# Altium PCB PCB1.PcbDoc
Units mm, origin at the board's own origin, x right, y up, seen from the top; angles counter-clockwise.
Board outline 28.19 x 24.38 mm, 2 copper layers (Top Layer, Bottom Layer); 10 components, 10 nets, 42 pads, 0 vias.
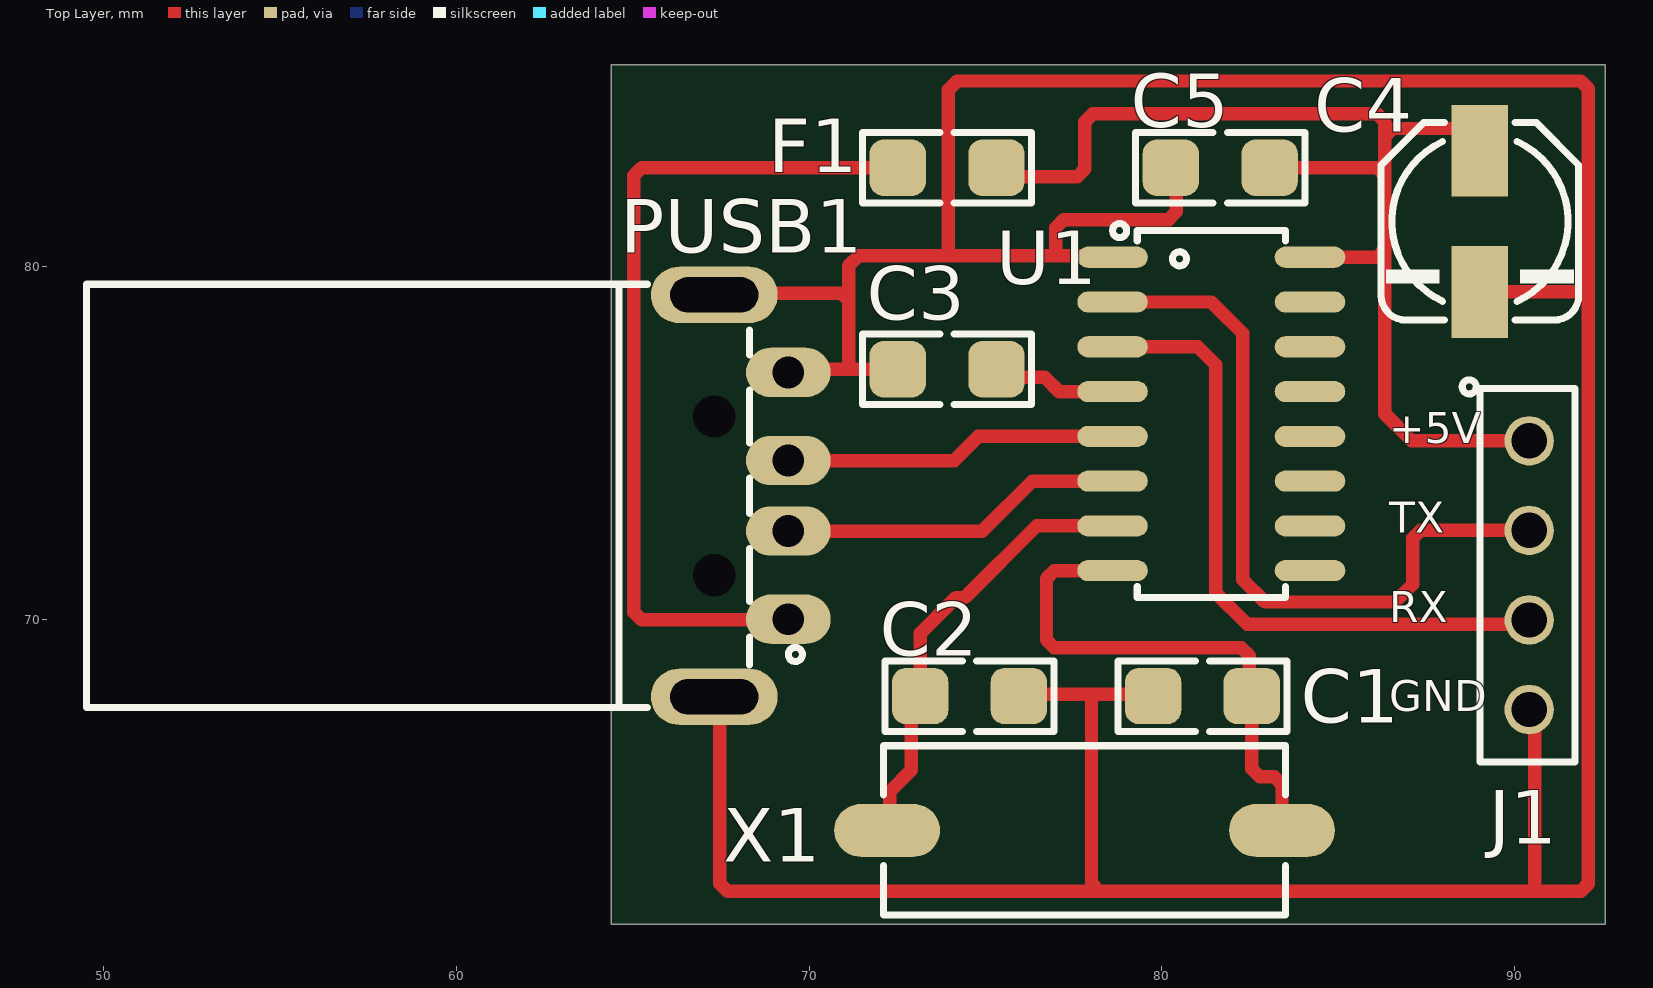
[diagram p0: Top Layer view]
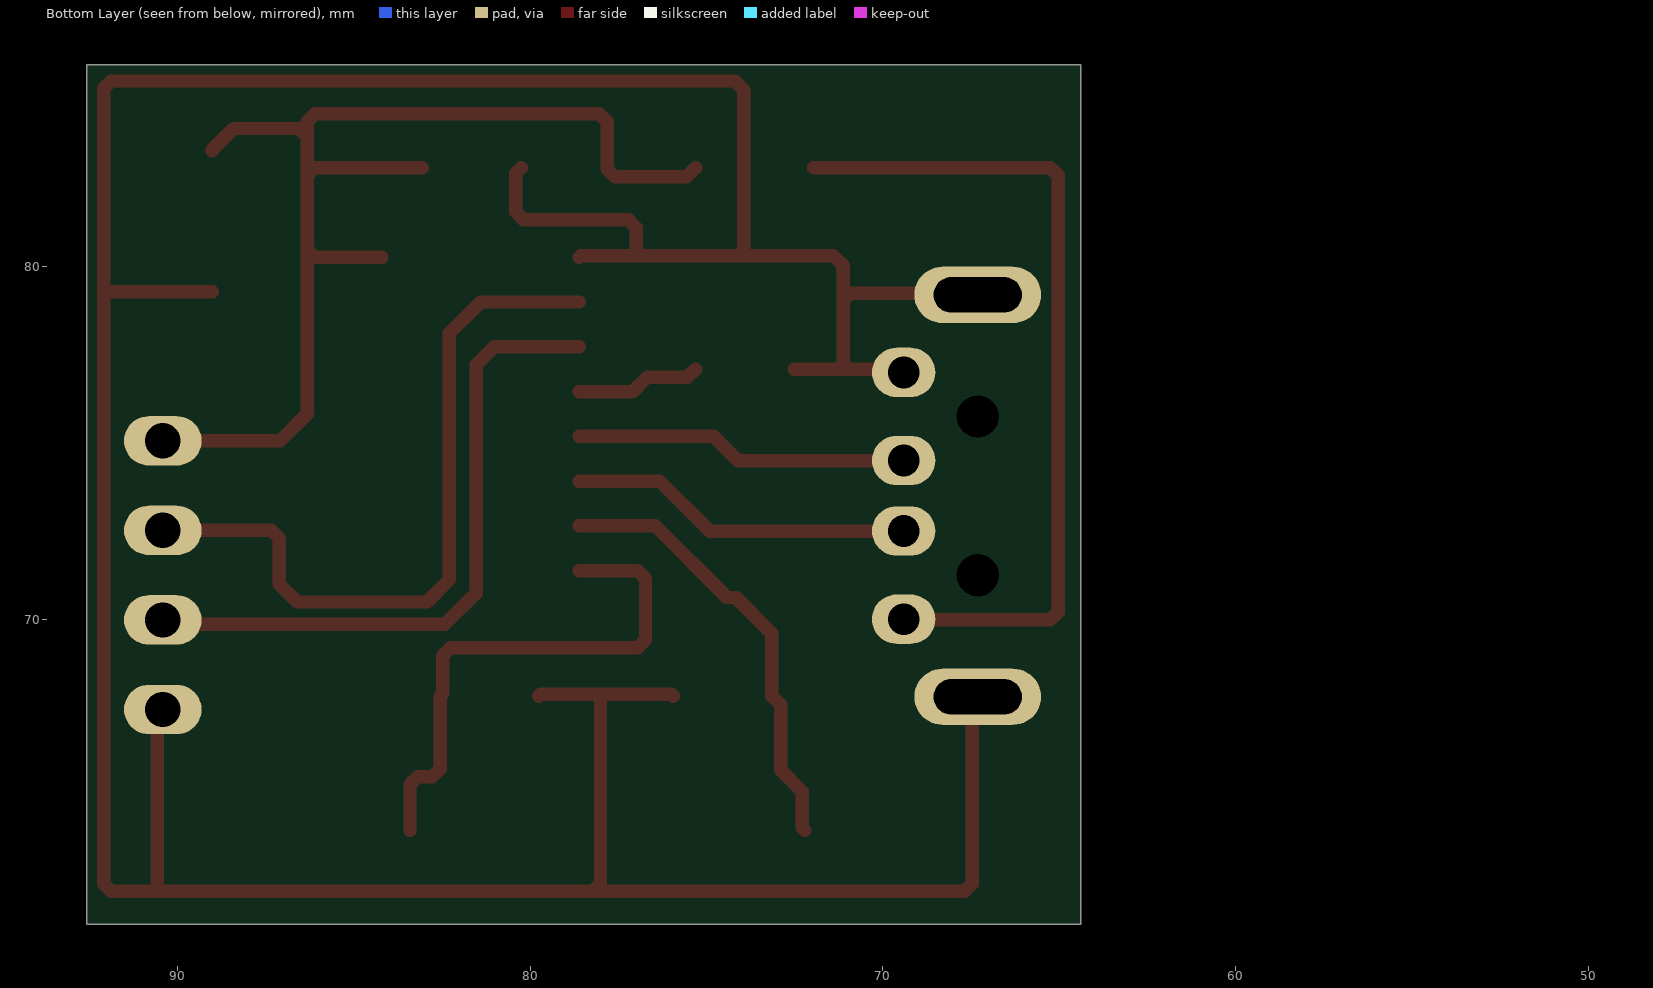
[diagram p1: Bottom Layer view, seen from below]

## Layer stack, top to bottom
Top Solder: solder mask 0.0102, Solder Resist, Dk 3.5
Top Layer: signal copper 0.0356
Dielectric 1: dielectric 0.32, FR-4, Dk 4.8
Bottom Layer: signal copper 0.0356
Bottom Solder: solder mask 0.0102, Solder Resist, Dk 3.5

## Board outline
64.389,61.341 92.583,61.341 92.583,85.725 64.389,85.725

## Design rules (kind name [scope] priority, off if disabled: settings)
Clearance [All] p1: gap=0.254 ignorepadtopadclearanceinfootprint=FALSE except(0: Arc-Hole Track-Hole SMDPad-Hole THPad-Hole Via-Hole Fill-Hole Poly-Hole Region-Hole Text-Hole)
PolygonConnect [All] p1: connectstyle=Relief reliefconductorwidth=0.254 reliefentries=4 polygonreliefangle="90 Angle" airgapwidth=0.254
RoutingVias [All] p1: holewidth=0.711 width=1.27 viastyle="Through Hole" minholewidth=0.711 minwidth=1.27 maxholewidth=0.711 maxwidth=1.27
SolderMaskExpansion [All] p1: expansion=0.102 istentingtop=FALSE
Width [All] p1: maxlimit=0.5 minlimit=0.254 preferedwidth=0.254
30 further rules are at their usual default settings.

## Components (designator, comment, footprint, x,y, rotation, side; value= is the part's Value field where it differs from the comment)
C1 "22pF" C1206 81.156,67.818 r0 top
C2 "22pF" C1206 74.549,67.818 r180 top
C3 "10nF" C1206 73.914,77.089 r0 top
C4 "10uF" C_EL_5 89.027,81.28 r270 top
C5 "100nF" C1206 81.661,82.804 r0 top
F1 "100mA" F1206 73.914,82.804 r0 top
J1 "HDRF4" HDR_F_1X4 90.424,71.247 r270 top
PUSB1 "CONN_USB_A" USB_A_PLG_RA 68.61,73.497 r90 top
U1 "CH340G" SO_16 81.407,75.819 r0 top
X1 "12MHz" XTL_2_11X5 77.813,64.008 r180 top

## Footprints (in the part's own frame and the unit in brackets; to place one, negate y for a bottom-side part, rotate by r counter-clockwise, add the part's x,y. Pads: shape width x height; smd on the part's side, far side on the other; paste and mask are expansions set on the pad)
C1206 [mm] "CHIP Capacitor, 3.2X1.6mm, 1206"
  rrect50% 1.6x1.6 smd mask+0.075: 1(-1.4,0) 2(1.4,0)
  Top Layer pour cut-out: -0.8,1 -0.8,-1 0.8,-1 0.8,1
  silkscreen extent -2.4,-1 2.4,1, body extent -1.6,-0.8 1.6,0.8, height 1
C_EL_5 [mm] "Electrolytic Cap, D: 5.0mm, L: 5.8mm, Size C"
  rect 2.6x1.6 smd: 1(-2,0) 2(2,0)
  Top Layer pour cut-out: 1.905,2.667 1.905,-2.7 -1.905,-2.7 -1.905,2.667
  silkscreen extent -2.8,-2.8 2.8,2.8, body extent -3,-2.65 3,2.65
F1206 [mm] "FUSE, 1206, 3.2x1.6mm"
  rrect50% 1.6x1.6 smd mask+0.075: 1(-1.4,0) 2(1.4,0)
  Top Layer pour cut-out: -0.8,1 -0.8,-1 0.8,-1 0.8,1
  silkscreen extent -2.4,-1 2.4,1, body extent -1.6,-0.8 1.6,0.8, height 1
HDR_F_1X4 [mm] "HEADER FEMALE pitch: 2.54mm"
  round 1.4 / inner round 1.4 / far side oval 1.4x2.2 hole 1 mask+0.1: 1(-3.81,0) 2(-1.27,0) 3(1.27,0) 4(3.81,0)
  silkscreen extent -5.54,-1.9 5.3,1.3, body extent -5.2,-1.3 5.21,1.2, height 8.5
SO_16 [mm] "SOP, SOIC, 3.9mm width, 1.27mm pitch,"
  oval 2x0.6 smd: 1(-2.8,4.445) 2(-2.8,3.175) 3(-2.8,1.905) 4(-2.8,0.635) 5(-2.8,-0.635) 6(-2.8,-1.905) 7(-2.8,-3.175) 8(-2.8,-4.445) 9(2.8,-4.445) 10(2.8,-3.175) 11(2.8,-1.905) 12(2.8,-0.635) 13(2.8,0.635) 14(2.8,1.905) 15(2.8,3.175) 16(2.8,4.445)
  silkscreen extent -2.8,-5.2 2.1,5.4, body extent -3.1,-4.95 3.1,4.95, height 1.7
USB_A_PLG_RA [mm] "CONN, USB, Type A, PLUG, Right Angle, SMD, THD"
  oval 1.4x2.4 / inner oval 1.4x1.8 / far side oval 1.4x1.8 hole 0.9 mask+0.1: 1(-3.5,-0.8) 2(-1,-0.8) 3(1,-0.8) 4(3.5,-0.8)
  oval 1.6x3.6 hole 1 slot 2.5 at 90 deg: SH1(-5.7,1.3) SH2(5.7,1.3)
  round 0.8 hole 1.2 unplated: ""(-2.25,1.3) ""(2.25,1.3)
  silkscreen extent -6,-1.2 6,19.1, body extent -6.3,-1.3 6.3,19, height 3.13
XTL_2_11X5 [mm] "SMD crystal resonator, ABL, ABLS, HC-49, HC49 11X4.5MM"
  oval 3x1.5 smd: 1(-5.6,0) 2(5.6,0)
  silkscreen extent -5.7,-2.4 5.7,2.4, body extent -6.4,-2.41 6.4,2.42, height 4.3

## Part data
C1 C2 C3 C5: library part CAP_SMD_FILM, "CAP, FILM, 680nF, 16V, Acryl, 20%, 1206", ASSEMBLY=ASSEMBLY, DESC=-, MANF=Murata, MANF_P#=-, PARAM="Acrylic, MetallizedStacked, 20%, -40~85oC", PARAM2=16V, PRICE="100= 40$"
C4: library part CAP_SMD_EL, "CAP, THD, ELEC,", ASSEMBLY=ASSEMBLY, DESC=DESCRIPTION, DIST#=MOUSER, MANF=MANF, MANF_P#=MANF_PART#, PARAM=20%, PARAM2=-V, PRICE="10= -$"
F1: library part FUSE_3A_1206_SLOW, "Fuse, 3A, 32VDC, 1206, SMD, Slow Blow", MANF=Bourns, MANF_P#=SF-1206SP300-2, PARAM="3A; 32VDC; Slow Blow", PARAM2=0.027Ohm, PRICE=0.9$
J1: library part HDR_F_1X4, "CONN, HEADER, Female, pitch: 2.54mm, 4POS"
PUSB1: library part CONN_USB_A_PLUG, "CONN, USB, A, PLUG, THD"
U1: library part CH340G_SOP16, "USB-UART", MANF_P#=CH340G
X1: library part XTL_2_HC49_8MHz_SMD, "Crystal MOST POPULAR ABL HC49 PACKAGE", MANF=ABRACON, MANF_P#=ABLS-8.000MHZ-B4-T, PARAM="8MHz, 18pF, 30PPM, -20~70oC", PRICE=0.3$

## Nets (pads, with @x,y where several pads share a name; then routed paths per layer and width w, separated by ;. In a path a pad name is that pad's centre, name@x,y a point inside that pad or via, vN(x,y) a via of type N, cw(c..) or ccw(c..) an arc to the next point about the centre after c; other vN are vias at no path point)
+3.3: C3.2 U1.4 | length 3.6
  Top Layer w0.381: C3.2 75.546,76.857 76.686,76.857 77.089,76.454 U1.4
+5: C4.1 C5.2 F1.2 J1.1 U1.16 | length 34.1
  Top Layer w0.381: F1.2 75.568,82.55 77.601,82.55 77.824,82.773 77.824,84.105 78.047,84.328 86.11,84.328 86.333,84.105 86.333,83.692 ; C5.2 86.11,82.804 86.333,82.581 ; U1.16 86.11,80.264 86.333,80.487 ; C4.1 89.027,83.306 88.417,83.915 86.556,83.915 86.333,83.692 ; J1.1 87.095,75.057 86.333,75.819 86.333,80.487 ; 86.333,80.487 86.333,82.581 ; 86.333,82.581 86.333,83.692
GND: C1.1 C2.1 C3.1 C4.2 C5.1 J1.4 PUSB1.4 PUSB1.SH1 PUSB1.SH2 U1.1 | length 117
  Top Layer w0.381: PUSB1.SH1 67.467,67.64 67.467,62.499 67.69,62.276 78.233,62.276 ; PUSB1.SH2 67.356,79.243 70.916,79.243 71.119,79.04 ; PUSB1.4 69.502,77.089 71.119,77.089 ; C3.1 71.119,77.089 ; C2.1 75.995,67.864 78.01,67.864 ; U1.1 78.565,80.306 77.71,80.306 77.706,80.31 76.992,80.31 ; C1.1 79.71,67.864 78.01,67.864 ; C5.1 80.418,82.647 80.418,81.549 80.195,81.326 77.215,81.326 76.992,81.103 76.992,80.31 ; C4.2 92.105,79.28 ; J1.4 90.581,67.28 90.581,62.276 ; 71.119,77.089 71.119,79.04 ; 71.119,79.04 71.119,80.025 71.404,80.31 73.944,80.31 ; 73.944,80.31 76.992,80.31 ; 73.944,80.31 73.944,85.009 74.198,85.263 91.882,85.263 92.105,85.04 92.105,79.28 ; 78.01,67.864 78.01,62.499 78.233,62.276 ; 78.233,62.276 90.581,62.276 ; 90.581,62.276 91.882,62.276 92.105,62.499 92.105,79.28
NetC1_2: C1.2 U1.8 X1.1 | length 15.2
  Top Layer w0.381: U1.8 76.957,71.374 76.733,71.151 76.733,69.413 76.957,69.19 82.256,69.19 82.479,68.966 82.479,67.895 C1.2 82.556,65.755 82.779,65.532 83.19,65.532 83.413,65.309 X1.1
NetC2_2: C2.2 U1.7 X1.2 | length 12.7
  Top Layer w0.381: X1.2 72.285,64.08 72.285,65.106 72.898,65.72 72.898,67.567 C2.2 73.149,69.593 74.168,70.612 74.422,70.612 76.454,72.644 U1.7
NetF1_1: F1.1 PUSB1.1 | length 23.9
  Top Layer w0.381: PUSB1.1 69.39,69.977 65.247,69.977 65.024,70.2 65.024,82.581 65.247,82.804 F1.1@71.969,82.804
NetPUSB1_2: PUSB1.2 U1.6 | length 9.8
  Top Layer w0.381: PUSB1.2 74.91,72.497 76.327,73.914 U1.6
NetPUSB1_3: PUSB1.3 U1.5 | length 9.5
  Top Layer w0.381: PUSB1.3 74.116,74.497 74.803,75.184 U1.5
RX: J1.3 U1.3 | length 18.9
  Top Layer w0.381: U1.3 81.026,77.724 81.153,77.597 81.534,77.216 81.534,70.739 82.423,69.85 90.297,69.85 J1.3
TX: J1.2 U1.2 | length 21
  Top Layer w0.381: U1.2 81.407,78.994 81.534,78.867 82.296,78.105 82.296,71.12 82.931,70.485 86.614,70.485 87.122,70.993 87.122,72.294 87.345,72.517 J1.2
pads on no net: PUSB1. U1.9 U1.10 U1.11 U1.12 U1.13 U1.14 U1.15

## Silkscreen, mask and mechanical layers (free items; w line width, h text height)
Top Overlay:
  text "+5V" at 86.46,74.691 h1.5
  text "TX" at 86.46,72.153 h1.5
  text "RX" at 86.46,69.613 h1.5
  text "GND" at 86.46,67.082 h1.5

## Text inside footprints (layer, text, board x,y; h text height)
PUSB1: Mechanical 1 "PCB Edge" at 64.137,78.67 h0.25 r270